# EAGLE board PID Board (EAGLE 8.2.1)
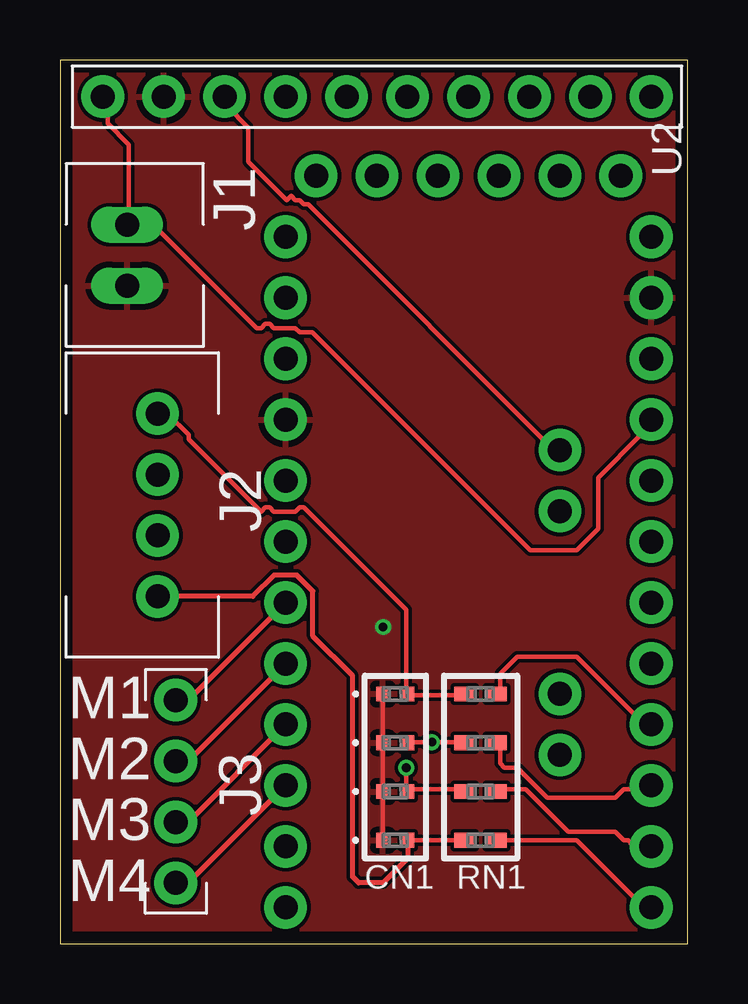
[diagram p0: board, top side]
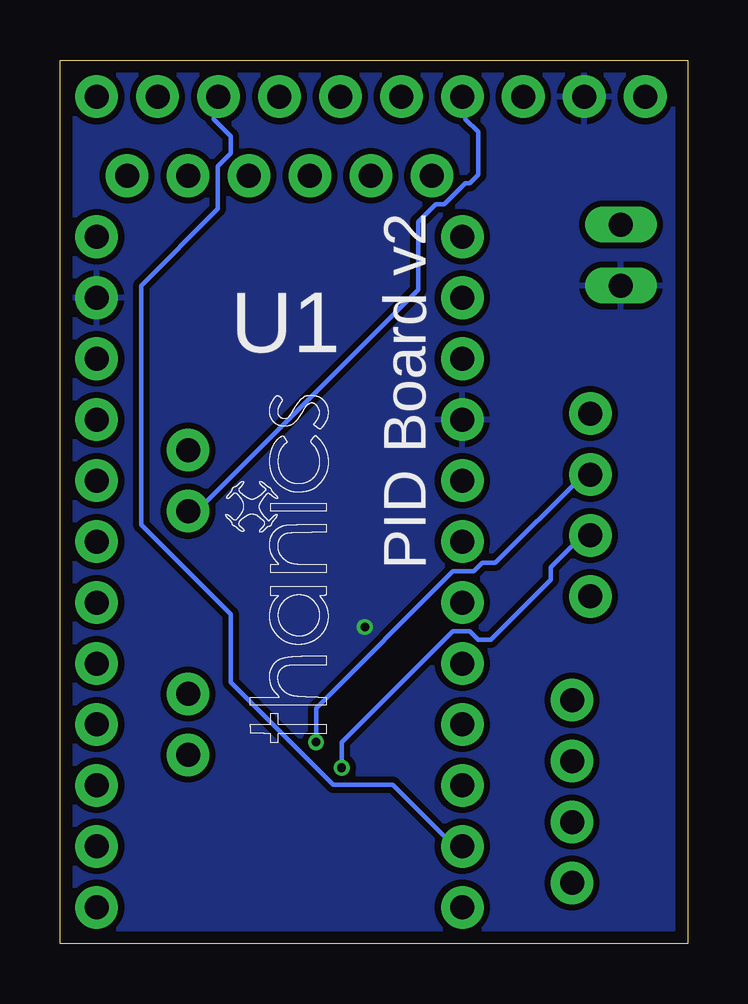
[diagram p1: board, bottom side, seen from below]

Size 26.16 x 36.83 mm. Coordinates in mm from the lower left corner, seen from the top.
Outline: 0,36.83 0,0 26.16,0 26.16,36.83 0,36.83
Copper layers (1*16): Top 0.035mm / dielectric 1.6mm / Bottom 0.035mm
Design rules "Elecrow_2-layer_PCB_eagle_rule": minimum track width 6mil, minimum drill 12mil, track to track 6mil, track to pad 6mil, pad to pad 6mil, via to via 8mil, smd to smd 0mil, copper to edge 20mil, drill to drill 10mil, minimum pad ring 6mil, minimum via ring 6mil, stop-mask expansion 0mil, vias tented up to drill 100mil, thermal gap 10mil

## Footprints (pad centres in the part's own frame; a part is rotated, then mirrored left to right if it is on the bottom)
G-155-M = smd 0.559 x 0.61: 1 -0.521,0; 2 0.521,0
XH_CONNECTOR = drill 1 long: 1 -1.27,0; 2 1.27,0
JST-XH_4POS = drill 1 pad 1.778: P$1 0,3.81; P$2 0,1.27; P$3 0,-1.27; P$4 0,-3.81
4_PIN_CONNECTOR = drill 1 pad 1.778: 1 0,3.81; 2 0,1.27; 3 0,-1.27; 4 0,-3.81
RC0402N-M = smd 0.864 x 0.61: 1 -0.66,0; 2 0.66,0
PRO-MINI-2 = drill 1 pad 1.778: A0 6.35,2.54; A1 6.35,0; A2 6.35,-2.54; A3 6.35,-5.08; A4 2.54,1.27; A5 2.54,3.81; A6 2.54,-8.89; A7 2.54,-6.35; D2 -8.89,2.54; D3 -8.89,0; D4 -8.89,-2.54; D5 -8.89,-5.08; D6 -8.89,-7.62; D7 -8.89,-10.16; D8 -8.89,-12.7; D9 -8.89,-15.24; D10 6.35,-15.24; D11 6.35,-12.7; D12 6.35,-10.16; D13 6.35,-7.62; DTR 5.08,15.24; GND 6.35,10.16; GND1 -8.89,5.08; GND2 -7.62,15.24; GND3 -5.08,15.24; RAW 6.35,12.7; RST 6.35,7.62; RST1 -8.89,7.62; RX1 -8.89,10.16; RX1-1 0,15.24; TX0 -8.89,12.7; TX0-1 2.54,15.24; VCC 6.35,5.08; VCC1 -2.54,15.24
MPU-9250 = drill 1 pad 1.778: 1 0,10.16; 2 0,7.62; 3 0,5.08; 4 0,2.54; 5 0,0; 6 0,-2.54; 7 0,-5.08; 8 0,-7.62; 9 0,-10.16; 10 0,-12.7

## Placement (x,y rotation side)
C1  1000pF  [G-155-M]  13.97,10.41 0 top
C2  1000pF  [G-155-M]  13.97,8.38 0 top
C3  1000pF  [G-155-M]  13.97,6.35 0 top
C4  1000pF  [G-155-M]  13.97,4.32 0 top
J1  POWER_CONNECTOR  [XH_CONNECTOR]  2.79,28.7 270 top
J2  SPI_CONNECTOR  [JST-XH_4POS]  4.06,18.29 0 top
J3  4_PIN_CONNECTOR  [4_PIN_CONNECTOR]  4.83,6.35 180 top
R1  75  [RC0402N-M]  17.53,10.41 0 top
R2  75  [RC0402N-M]  17.53,8.38 0 top
R3  75  [RC0402N-M]  17.53,6.35 0 top
R4  75  [RC0402N-M]  17.53,4.32 0 top
U1  PRO-MINI-2  [PRO-MINI-2]  18.29,16.76 0 top
U2  MPU-9250  [MPU-9250]  11.94,35.31 90 top

## Library data of the parts
C1-C4 = 1000pF-capacitor; COPYRIGHT: Copyright C 2015 Accelerated Designs. All rights reserved; MANUFACTURER_PART_NUMBER: GRM155R60J102KA01D; VENDOR: Vendor
J1-J3 U2 = thanics_robotics
R1-R4 = 75-resistor; CASE: 0402 1005 metric; COMPOSITION: Thick Film; COPYRIGHT: Copyright C 2015 Accelerated Designs. All rights reserved; DATASHEET: httpwww.yageo.comdocumentsrecentPYuRC0402_51_RoHS_L_6.pdf; DESCRIPTION: RES 75 OHM 116W 5% 0402 SMD; DIGIKEYPARTNUMBER: 31175JRTRND; HEIGHT: 0.016" 0.40mm; LEADSTYLE: Surface Mount SMD SMT; MANUFACTURER_PART_NUMBER: RC0402JR0775RL; NEWARKPARTNUMBER: 66R1890; NUMBEROFTERMINATIONS: 2; PACKAGECASE: 0402 1005 Metric; PACKAGING: Tape &amp Reel TR; POWERWATTS: 0.063W 116W; QUANTITY_AVAILABLE: 60000; RESISTANCEINOHMS: 75.0; RESISTANCEOHMS: 75; SIZEDIMENSION: 0.039" L x 0.020" W 1.00mm x 0.50mm; TEMPERATURECOEFFICIENT: 100ppm°C; TOLERANCE: 5%; VENDOR: Yageo; VOLTAGEWORKING: 50V
U1 = Arduino-clone

## Nets
GND: C1.1 C2.1 C3.1 C4.1 J1.2 U1.GND U1.GND1 U2.2
N$1: J1.1 U1.VCC U2.1
N$2: R1.2 U1.D13
N$3: U1.D8 U2.8
N$4: U1.A4 U2.4
N$5: U1.A5 U2.3
N$6: R2.2 U1.D12
N$7: R3.2 U1.D11
N$8: R4.2 U1.D10
N$9: C4.2 J2.P$4 R4.1
N$10: J3.1 U1.D7
N$11: J3.2 U1.D6
N$12: J3.3 U1.D5
N$13: J3.4 U1.D4
N$14: C3.2 J2.P$3 R3.1
N$15: C2.2 J2.P$2 R2.1
N$16: C1.2 J2.P$1 R1.1

## Tracks (layer width: path | path; a pad name or v marks a point on that pad's centre or on a via)
GND  (via drill 0.36)
  Top 0.178: C1.1 C2.1 C3.1 C4.1
  other vias: 13.46,13.21
  pour Bottom (isolate 0.254): 0,36.83 26.16,36.83 26.16,0 0,0
  pour Top: 0,36.83 26.16,36.83 26.16,0 0,0
N$1
  Top 0.178: U2.1 1.8,35.25 1.98,35.08 1.98,34.19 2.87,33.3 2.87,30.1 J1.1 2.87,29.92 3.94,29.92 8.2,25.65 8.38,25.65 8.56,25.83 8.74,25.83 8.91,25.65 9.8,25.65 9.98,25.48 10.52,25.48 19.58,16.41 21.54,16.41 22.43,17.3 22.43,19.43 24.21,21.21 24.21,21.39 24.56,21.74 U1.VCC
N$2
  Top 0.178: R1.2 18.34,10.54 18.34,11.25 19.05,11.96 21.54,11.96 24.21,9.3 24.56,9.3 U1.D13
N$3
  Bottom 0.178: U1.D8 9.45,4.14 9.8,4.14 12.29,6.63 14.78,6.63 19.05,10.9 19.05,13.74 22.78,17.48 22.78,27.43 19.58,30.63 19.58,32.41 19.05,32.94 19.05,33.66 19.76,34.37 19.76,35.08 19.58,35.25 U2.8
N$4
  Bottom 0.178: U1.A4 20.83,18.19 20.29,18.19 11.23,27.25 11.23,30.1 10.52,30.81 10.16,30.81 9.27,31.7 9.09,31.7 8.74,32.05 8.74,33.83 9.27,34.37 9.27,35.25 U2.4
N$5
  Top 0.178: U1.A5 20.83,20.68 20.47,20.68 10.34,30.81 10.16,30.81 9.98,30.99 9.8,30.99 9.63,31.17 9.45,30.99 7.85,32.59 7.85,34.01 6.96,34.9 6.96,35.25 U2.3
N$6
  Top 0.178: R2.2 18.34,8.23 18.34,7.52 18.52,7.34 19.05,7.34 20.29,6.1 23.14,6.1 23.5,6.45 24.56,6.45 U1.D12
N$7
  Top 0.178: R3.2 18.34,6.45 19.41,6.45 21.18,4.67 23.14,4.67 23.5,4.32 23.67,4.32 23.85,4.14 24.56,4.14 U1.D11
N$8
  Top 0.178: R4.2 21.54,4.32 24.21,1.65 24.56,1.65 U1.D10
N$9
  Top 0.178: R4.1 C4.2
  Top 0.203: C4.2 14.49,3.57 13.46,2.54 12.45,2.54 12.19,2.79 12.19,11.18 10.54,12.83 10.54,14.7 9.87,15.37 8.93,15.37 8.04,14.48 J2.P$4
N$10
  Top 0.203: J3.1 5.33,2.54 U1.D7
N$11
  Top 0.203: J3.2 5.33,5.08 U1.D6
N$12
  Top 0.203: J3.3 5.33,7.62 U1.D5
N$13
  Top 0.203: J3.4 5.33,10.16 U1.D4
N$14  (via drill 0.36)
  Top 0.178: R3.1 16.74,6.45 14.61,6.45 C3.2 14.43,6.45 v14.43,7.34
  Bottom 0.178: v14.43,7.34 14.43,8.41 9.8,13.03 9.09,13.03 8.74,12.68 8.2,12.68 5.71,15.16 5.71,15.7 4.47,16.94 4.12,16.94 J2.P$3
N$15  (via drill 0.36)
  Top 0.178: C2.2 14.61,8.41 v15.49,8.41 16.74,8.41 R2.1
  Bottom 0.178: v15.49,8.41 15.49,9.83 9.8,15.52 8.91,15.52 8.56,15.88 8.03,15.88 4.47,19.43 4.12,19.43 J2.P$2
N$16
  Top 0.178: R1.1 16.74,10.36 14.61,10.36 C1.2 14.43,10.54 14.43,13.92 10.16,18.19 9.98,18.19 9.8,18.01 8.91,18.01 8.74,18.19 8.56,18.19 8.38,18.01 5.36,21.03 5.36,21.21 4.47,22.1 J2.P$1

## Text on the board
tPlace: CN1 | RN1
tNames: U2 | J1 | J2 | M1 | M2 | M3 | J3 | M4
bNames: PID Board v2 | U1